# EAGLE board brick_i2c_9axis_MPU9250 (EAGLE 7.4.0)
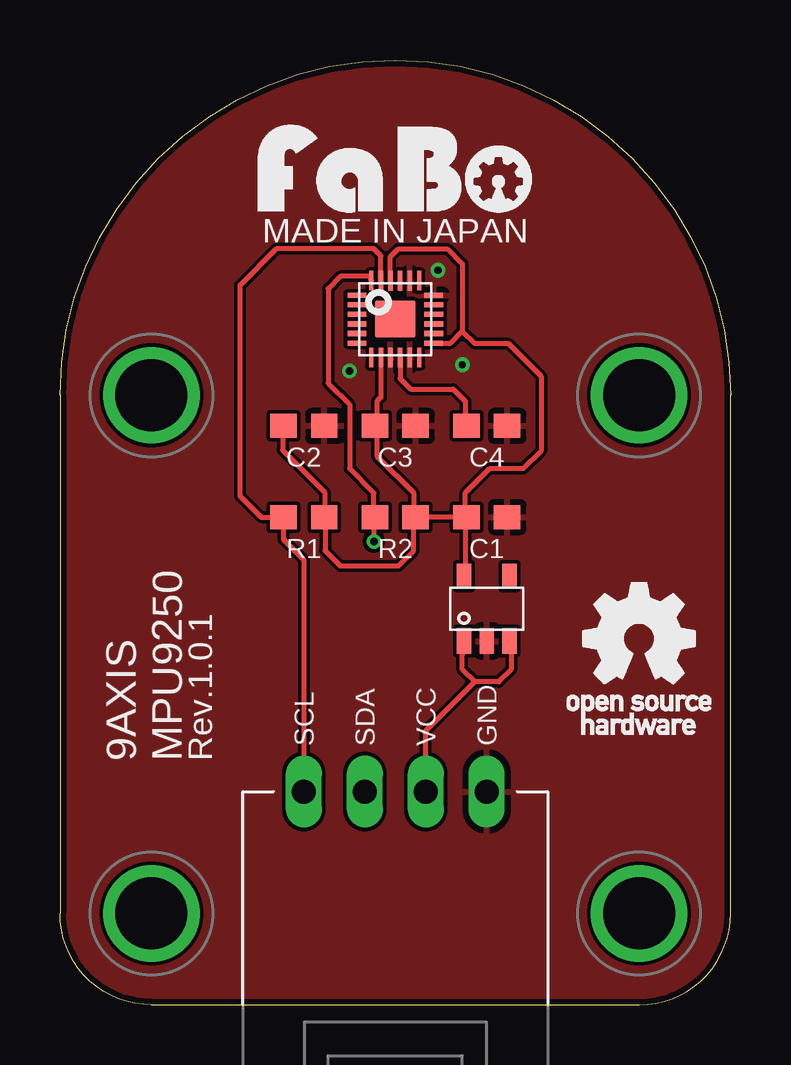
[diagram p0: board, top side]
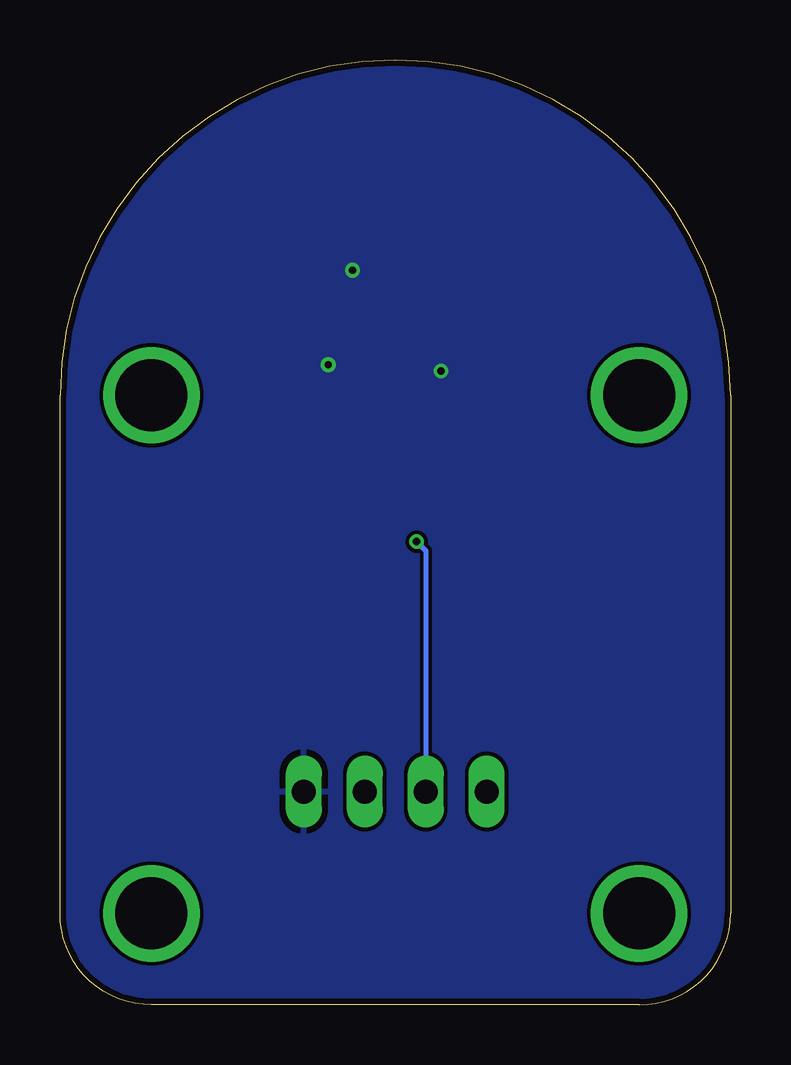
[diagram p1: board, bottom side, seen from below]

Size 27.94 x 39.37 mm. Coordinates in mm from the lower left corner, seen from the top.
Copper layers (1*16): Top 0.035mm / dielectric 1.5mm / Bottom 0.035mm
Design rules "Elecrow_2-layer_eagle_rule": minimum track width 6mil, minimum drill 12mil, track to track 6mil, track to pad 6mil, pad to pad 6mil, via to via 6mil, smd to smd 0mil, copper to edge 10mil, drill to drill 10mil, minimum pad ring 10mil, minimum via ring 6mil, stop-mask expansion 2mil, vias tented up to drill 100mil, thermal gap 10mil

## Footprints (pad centres in the part's own frame; a part is rotated, then mirrored left to right if it is on the bottom)
EIA0603 = smd 1.1 x 1: 1 -0.85,0; 2 0.85,0
INVENSENSE-MPU9250 = smd 0.8 x 0.2: 1 -1.6,1; 2 -1.6,0.6; 3 -1.6,0.2; 4 -1.6,-0.2; 5 -1.6,-0.6; 6 -1.6,-1; 13 1.6,-1; 14 1.6,-0.6; 15 1.6,-0.2; 16 1.6,0.2; 17 1.6,0.6; 18 1.6,1 | smd 0.2 x 0.8: 7 -1,-1.6; 8 -0.6,-1.6; 9 -0.2,-1.6; 10 0.2,-1.6; 11 0.6,-1.6; 12 1,-1.6; 19 1,1.6; 20 0.6,1.6; 21 0.2,1.6; 22 -0.2,1.6; 23 -0.6,1.6; 24 -1,1.6 | smd 1.7 x 1.54: 25 0,0
TI-LP2985 = smd 0.6 x 1.05: 1 -0.95,-1.35; 2 0,-1.35; 3 0.95,-1.35; 4 0.95,1.35; 5 -0.95,1.35
FABO_BRICK_I2C = drill 1 long: GND 3.81,-10.16; SCL -3.81,-10.16; SDA -1.27,-10.16; VCC 1.27,-10.16 | drill 3 pad 3.81: P$1 -10.16,6.35; P$2 10.16,6.35; P$3 -10.16,-15.24; P$4 10.16,-15.24

## Placement (x,y rotation side)
C1  1uF  [EIA0603]  17.78,20.32 0 top
C2  0.1uF  [EIA0603]  10.16,24.13 0 top
C3  0.1uF  [EIA0603]  13.97,24.13 0 top
C4  0.1uF  [EIA0603]  17.78,24.13 0 top
IC1  [INVENSENSE-MPU9250]  13.97,28.57 0 top
IC2  [TI-LP2985]  17.78,16.51 0 top
J1  [FABO_BRICK_I2C]  13.97,19.05 0 top
R1  4.7k  [EIA0603]  10.16,20.32 0 top
R2  4.7k  [EIA0603]  13.97,20.32 0 top
U$2  [LOGO_OSHW_T_M]  24.13,15.24 0 top
U$3  [LOGO_FABO_M]  13.97,33.02 0 top

## Library data of the parts
C1-C4 R1 R2 U$2 U$3 = FaBo-etc
IC1 = FaBo-Mems
IC2 = FaBo-Supply
J1 = FaBo-Template

## Nets
3V3: C1.1 C2.1 C3.1 IC1.8 IC1.13 IC1.22 IC2.5 R1.2 R2.2
5V: IC2.1 IC2.3 J1.VCC
GND: C1.2 C2.2 C3.2 C4.2 IC1.9 IC1.11 IC1.18 IC1.20 IC2.2 J1.GND
N$5: C4.1 IC1.10
SCL: IC1.23 J1.SCL R1.1
SDA: IC1.24 J1.SDA R2.1

## Tracks (layer width: path | path; a pad name or v marks a point on that pad's centre or on a via)
3V3
  Top 0.203: C1.1 16.93,20.66 16.89,20.7 16.89,21.34 17.91,22.35 19.3,22.35 20.07,23.11 20.07,26.16 18.67,27.56 17.27,27.56 16.76,28.07 | 15.59,27.56 IC1.13 16.27,27.57 16.76,28.07 | IC1.22 13.77,31.17 14.1,31.5 16.13,31.5 16.76,30.86 16.76,28.07 | IC1.8 13.37,25.31 13.21,25.15 13.21,24.22 C3.1 13.12,23.84 13.21,23.75 13.21,22.86 14.73,21.34 14.73,20.41 R2.2 | C1.1 R2.2 | R1.2 11.01,20.66 11.05,20.7 | 11.05,20.7 11.05,21.34 9.27,23.11 9.27,24 9.31,24.04 C2.1 | 11.05,20.7 11.05,18.92 11.68,18.29 14.1,18.29 14.73,18.92 14.73,20.23 R2.2 | C1.1 16.93,20.23 16.89,20.19 16.89,17.92 IC2.5
5V
  Top 0.203: IC2.3 18.8,15.09 18.8,13.97 18.29,13.46 17.27,13.46 | 17.27,13.46 16.76,13.97 16.76,14.61 IC2.1 | J1.VCC 15.24,11.43 17.27,13.46
GND  (via drill 0.3)
  other vias: 15.75,30.61 16.76,26.67 12.06,26.42
  pour Bottom: -1.27,-1.27 29.21,-1.27 29.21,40.64 -1.27,40.64
  pour Top: -1.27,-1.27 29.21,-1.27 29.21,40.64 -1.27,40.64
N$5
  Top 0.203: IC1.10 14.17,26.09 14.61,25.65 16.38,25.65 16.89,25.15 16.89,24.17 C4.1
SCL
  Top 0.203: IC1.23 13.37,31.21 13.08,31.5 9.02,31.5 7.49,29.97 7.49,21.21 8.38,20.32 R1.1 9.31,19.39 10.16,18.54 J1.SCL
SDA  (via drill 0.3)
  Top 0.203: IC1.24 12.95,30.19 12.95,30.35 11.68,30.35 11.18,29.84 11.18,25.91 12.06,25.02 12.06,22.35 13.08,21.34 13.08,20.36 R2.1 13.08,20.28 v13.08,19.3
  Bottom 0.203: v13.08,19.3 12.7,18.92 J1.SDA

## Text on the board
tPlace: MADE IN JAPAN | 9AXIS / MPU9250 | Rev.1.0.1